# EAGLE board hora_panel (EAGLE 9.6.2)
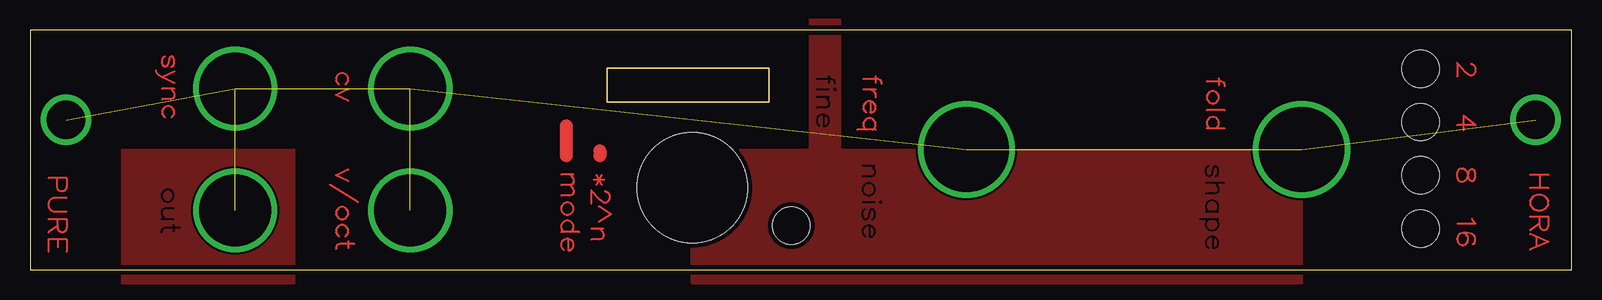
[diagram p0: board, top side]
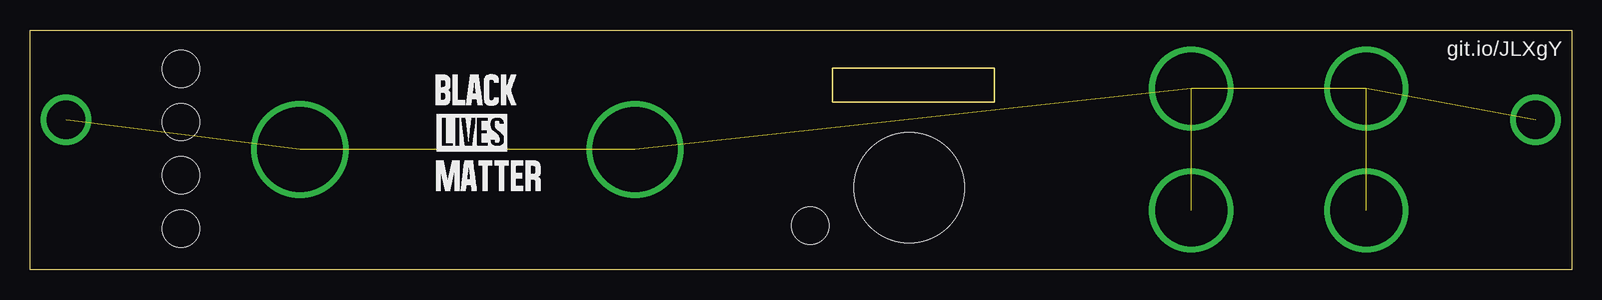
[diagram p1: board, bottom side, seen from below]

Size 128.5 x 20 mm. Coordinates in mm from the lower left corner, seen from the top.
Outline: 0,20 0,0 128.5,0 128.5,20 0,20
Outline: 48.1,16.8 61.6,16.8 61.6,14 48.1,14 48.1,16.8
Copper layers (1*16): Top 0.0356mm / dielectric 1.5011mm / Bottom 0.0356mm
Design rules "oshpark-2layer": minimum track width 6mil, minimum drill 13mil, track to track 6mil, track to pad 6mil, pad to pad 6mil, via to via 6mil, smd to smd 6mil, copper to edge 15mil, drill to drill 6mil, minimum pad ring 7mil, minimum via ring 7mil, stop-mask expansion 2.5mil, vias tented up to drill 0mil, thermal gap 10mil
Net classes: 0 default: width 0.203 mm; 1 power: width 0.305 mm; 2 ground: width 0.305 mm
Holes 3.1 mm at 63.45,3.67 115.91,16.76 115.91,12.31 115.91,7.87 115.91,3.42
Holes 9.2 mm at 55.2,6.85
tRestrict: 195 lines
Milling: area 48.1,14 to 61.6,16.8

## Placement (x,y rotation side)
U$1  [BLACK-SILK-XS]  94.7,13.72 0 bottom
U$2  [LIVES-SILK-XS]  94.6,9.9 0 bottom
U$3  [MATTER-SILK-XS]  94.66,6.6 0 bottom

## Library data of the parts
U$1-U$3 = BLACK_LIVES_MATTER

## Tracks (layer width: path | path; a pad name or v marks a point on that pad's centre or on a via)
GND  (via drill 3.2, 6, 7.1)  (7 unrouted)
  other vias: 17.1,15.11 31.7,15.11 17.1,4.95 31.7,4.95 78.06,10.03 3,12.5 106,10.03 125.5,12.5
N$1
  Top 1.1: 44.7,12 44.7,9.5
N$2
  Top 1.1: 47.5,9.9 47.5,9.5
N$3
  Top 0.168: 44.36,4.81 44.5,4.65
N$4
  Top 0.168: 47.86,7.49 47,7.49
N$5
  Top 0.168: 47.65,7.89 47.22,7.09
N$6
  Top 0.168: 47.65,7.09 47.22,7.89
N$7
  Top 0.168: 47.93,6.54 48.01,6.54
N$8
  Top 0.168: 48.01,6.54 48.15,6.46
N$9
  Top 0.168: 48.15,6.46 48.22,6.38
N$10
  Top 0.168: 48.22,6.38 48.29,6.22
N$11
  Top 0.168: 48.29,6.22 48.29,5.9
N$12
  Top 0.168: 48.29,5.9 48.22,5.74
N$13
  Top 0.168: 48.22,5.74 48.15,5.66
N$14
  Top 0.168: 48.15,5.66 48.01,5.58
N$15
  Top 0.168: 48.01,5.58 47.86,5.58
N$16
  Top 0.168: 47.86,5.58 47.72,5.66
N$17
  Top 0.168: 47.72,5.66 47.5,5.82
N$18
  Top 0.168: 47.5,5.82 46.78,6.62
N$19
  Top 0.168: 46.78,6.62 46.78,5.5
N$20
  Top 0.168: 48.44,4.62 47.43,5.26
N$21
  Top 0.168: 48.44,4.62 47.43,3.98
N$22
  Top 0.168: 47.8,3.4 47.51,3.4
N$23
  Top 0.168: 47.51,3.4 46.79,3.4
N$24
  Top 0.168: 47.51,3.4 47.73,3.16
N$25
  Top 0.168: 47.73,3.16 47.8,3
N$26
  Top 0.168: 47.8,3 47.8,2.76
N$27
  Top 0.168: 47.8,2.76 47.73,2.6
N$28
  Top 0.168: 47.73,2.6 47.51,2.52
N$29
  Top 0.168: 47.51,2.52 46.79,2.52
N$30
  Top 0.168: 45.3,7.93 45.01,7.93
N$31
  Top 0.168: 45.01,7.93 44.29,7.93
N$32
  Top 0.168: 45.01,7.93 45.22,7.69
N$33
  Top 0.168: 45.22,7.69 45.3,7.53
N$34
  Top 0.168: 45.3,7.53 45.3,7.29
N$35
  Top 0.168: 45.3,7.29 45.22,7.13
N$36
  Top 0.168: 45.22,7.13 45.01,7.05
N$37
  Top 0.168: 45.01,7.05 44.29,7.05
N$38
  Top 0.168: 45.01,7.05 45.22,6.81
N$39
  Top 0.168: 45.22,6.81 45.3,6.65
N$40
  Top 0.168: 45.3,6.65 45.3,6.41
N$41
  Top 0.168: 45.3,6.41 45.22,6.25
N$42
  Top 0.168: 45.22,6.25 45.01,6.17
N$43
  Top 0.168: 45.01,6.17 44.29,6.17
N$44
  Top 0.168: 45.3,5.21 45.22,5.37
N$45
  Top 0.168: 45.22,5.37 45.08,5.53
N$46
  Top 0.168: 45.08,5.53 44.86,5.61
N$47
  Top 0.168: 44.86,5.61 44.72,5.61
N$48
  Top 0.168: 44.72,5.61 44.5,5.53
N$49
  Top 0.168: 44.5,5.53 44.36,5.37
N$50
  Top 0.168: 2.25,7.64 3.04,7.64 3.04,6.92 2.97,6.68 2.9,6.6 2.76,6.52 2.54,6.52 2.4,6.6 2.33,6.68 2.25,6.92 2.25,7.64 | 2.25,7.64 1.54,7.64
N$51
  Top 0.168: 3.04,5.96 1.97,5.96 1.75,5.88 1.61,5.72 1.54,5.48 1.54,5.32 1.61,5.08 1.75,4.92 1.97,4.84 3.04,4.84
N$52
  Top 0.168: 2.33,4.21 3.04,4.21 3.04,3.49 2.97,3.25 2.9,3.17 2.76,3.09 2.61,3.09 2.47,3.17 2.4,3.25 2.33,3.49 2.33,3.65 | 2.33,4.21 1.54,4.21 | 2.33,3.65 2.33,4.21 | 2.33,3.65 1.54,3.09
N$53
  Top 0.168: 2.33,2.53 3.04,2.53 3.04,1.49 | 2.33,2.53 1.54,2.53 1.54,1.49 | 2.33,2.53 2.33,1.89
N$54
  Top 0.168: 126.56,7.91 125.85,7.91 | 125.85,7.91 125.06,7.91 | 126.56,6.79 125.85,6.79 | 125.85,6.79 125.06,6.79 | 125.85,7.91 125.85,6.79
N$55
  Top 0.168: 44.36,5.37 44.29,5.21
N$56
  Top 0.168: 126.56,5.75 126.49,5.91 126.35,6.07 126.2,6.15 125.99,6.23 125.63,6.23 125.42,6.15 125.27,6.07 125.13,5.91 125.06,5.75 125.06,5.43 125.13,5.28 125.27,5.12 125.42,5.04 125.63,4.96 125.99,4.96 126.2,5.04 126.35,5.12 126.49,5.28 126.56,5.43 126.56,5.75
N$57
  Top 0.168: 125.85,4.4 126.56,4.4 126.56,3.68 126.49,3.44 126.42,3.36 126.28,3.28 126.13,3.28 125.99,3.36 125.92,3.44 125.85,3.68 125.85,3.84 | 125.85,4.4 125.06,4.4 | 125.85,3.84 125.85,4.4 | 125.85,3.84 125.06,3.28
N$58
  Top 0.168: 125.06,2.96 126.56,2.32 125.06,1.68
N$59
  Top 0.168: 125.56,2.72 125.56,1.92
N$60
  Top 0.168: 44.29,5.21 44.29,4.97
N$61
  Top 0.168: 44.29,4.97 44.36,4.81
N$62
  Top 0.168: 44.5,4.65 44.72,4.57
N$63
  Top 0.168: 44.72,4.57 44.86,4.57
N$64
  Top 0.168: 44.86,4.57 45.08,4.65
N$65
  Top 0.168: 45.08,4.65 45.22,4.81
N$66
  Top 0.168: 45.22,4.81 45.3,4.97
N$67
  Top 0.168: 45.3,4.97 45.3,5.21
N$68
  Top 0.168: 45.8,3.14 45.08,3.14
N$69
  Top 0.168: 45.08,3.14 44.5,3.14
N$70
  Top 0.168: 44.5,3.14 44.29,3.14
N$71
  Top 0.168: 45.08,3.14 45.22,3.3
N$72
  Top 0.168: 45.22,3.3 45.3,3.46
N$73
  Top 0.168: 45.3,3.46 45.3,3.69
N$74
  Top 0.168: 45.3,3.69 45.22,3.85
N$75
  Top 0.168: 45.22,3.85 45.08,4.01
N$76
  Top 0.168: 45.08,4.01 44.86,4.09
N$77
  Top 0.168: 44.86,4.09 44.72,4.09
N$78
  Top 0.168: 44.72,4.09 44.5,4.01
N$79
  Top 0.168: 44.5,4.01 44.36,3.85
N$80
  Top 0.168: 44.36,3.85 44.29,3.69
N$81
  Top 0.168: 44.29,3.69 44.29,3.46
N$82
  Top 0.168: 44.29,3.46 44.36,3.3
N$83
  Top 0.168: 44.36,3.3 44.5,3.14
N$84
  Top 0.168: 44.86,2.58 44.86,1.62
N$85
  Top 0.168: 44.86,1.62 45.01,1.62
N$86
  Top 0.168: 45.01,1.62 45.15,1.7
N$87
  Top 0.168: 45.15,1.7 45.22,1.78
N$88
  Top 0.168: 45.22,1.78 45.3,1.94
N$89
  Top 0.168: 45.3,1.94 45.3,2.18
N$90
  Top 0.168: 45.3,2.18 45.22,2.34
N$91
  Top 0.168: 45.22,2.34 45.08,2.5
N$92
  Top 0.168: 45.08,2.5 44.86,2.58
N$93
  Top 0.168: 44.86,2.58 44.72,2.58
N$94
  Top 0.168: 44.72,2.58 44.5,2.5
N$95
  Top 0.168: 44.5,2.5 44.36,2.34
N$96
  Top 0.168: 44.36,2.34 44.29,2.18
N$97
  Top 0.168: 44.29,2.18 44.29,1.94
N$98
  Top 0.168: 44.29,1.94 44.36,1.78
N$99
  Top 0.168: 44.36,1.78 44.5,1.62
N$100
  Top 0.168: 99.6,15.3 99.6,15.46
N$101
  Top 0.168: 99.6,15.46 99.53,15.62
N$102
  Top 0.168: 99.53,15.62 99.32,15.7
N$103
  Top 0.168: 99.32,15.7 98.09,15.7
N$104
  Top 0.168: 99.1,15.94 99.1,15.38
N$105
  Top 0.168: 99.1,14.51 99.03,14.67
N$106
  Top 0.168: 99.03,14.67 98.89,14.83
N$107
  Top 0.168: 98.89,14.83 98.67,14.91
N$108
  Top 0.168: 98.67,14.91 98.53,14.91
N$109
  Top 0.168: 98.53,14.91 98.31,14.83
N$110
  Top 0.168: 98.31,14.83 98.17,14.67
N$111
  Top 0.168: 98.17,14.67 98.09,14.51
N$112
  Top 0.168: 98.09,14.51 98.09,14.27
N$113
  Top 0.168: 98.09,14.27 98.17,14.11
N$114
  Top 0.168: 98.17,14.11 98.31,13.95
N$115
  Top 0.168: 98.31,13.95 98.53,13.87
N$116
  Top 0.168: 98.53,13.87 98.67,13.87
N$117
  Top 0.168: 98.67,13.87 98.89,13.95
N$118
  Top 0.168: 98.89,13.95 99.03,14.11
N$119
  Top 0.168: 99.03,14.11 99.1,14.27
N$120
  Top 0.168: 99.1,14.27 99.1,14.51
N$121
  Top 0.168: 99.6,13.31 98.09,13.31
N$122
  Top 0.168: 99.6,11.79 98.89,11.79
N$123
  Top 0.168: 98.89,11.79 98.31,11.79
N$124
  Top 0.168: 98.31,11.79 98.09,11.79
N$125
  Top 0.168: 98.89,11.79 99.03,11.95
N$126
  Top 0.168: 99.03,11.95 99.1,12.11
N$127
  Top 0.168: 99.1,12.11 99.1,12.35
N$128
  Top 0.168: 99.1,12.35 99.03,12.51
N$129
  Top 0.168: 99.03,12.51 98.89,12.67
N$130
  Top 0.168: 98.89,12.67 98.67,12.75
N$131
  Top 0.168: 98.67,12.75 98.53,12.75
N$132
  Top 0.168: 98.53,12.75 98.31,12.67
N$133
  Top 0.168: 98.31,12.67 98.17,12.51
N$134
  Top 0.168: 98.17,12.51 98.09,12.35
N$135
  Top 0.168: 98.09,12.35 98.09,12.11
N$136
  Top 0.168: 98.09,12.11 98.17,11.95
N$137
  Top 0.168: 98.17,11.95 98.31,11.79
N$138
  pour Top: 65,8.8 65,20.9 67.5,20.9 67.5,8.8
N$139
  pour Top: 55.2,10.03 106,10.03 106,-1.2 55.2,-1.2
N$140
  pour Top: 7.7,10.03 22,10.03 22,-1.2 7.7,-1.2
N$210
  Top 0.168: 120.13,17.16 120.2,17.16
N$211
  Top 0.168: 120.2,17.16 120.34,17.08
N$212
  Top 0.168: 120.34,17.08 120.42,17
N$213
  Top 0.168: 120.42,17 120.49,16.84
N$214
  Top 0.168: 120.49,16.84 120.49,16.52
N$215
  Top 0.168: 120.49,16.52 120.42,16.36
N$216
  Top 0.168: 120.42,16.36 120.34,16.29
N$217
  Top 0.168: 120.34,16.29 120.2,16.2
N$218
  Top 0.168: 120.2,16.2 120.06,16.2
N$219
  Top 0.168: 120.06,16.2 119.91,16.29
N$220
  Top 0.168: 119.91,16.29 119.7,16.44
N$221
  Top 0.168: 119.7,16.44 118.98,17.24
N$222
  Top 0.168: 118.98,17.24 118.98,16.12
N$223
  Top 0.168: 120.49,12.04 119.48,12.84
N$224
  Top 0.168: 119.48,12.84 119.48,11.64
N$225
  Top 0.168: 120.49,12.04 118.98,12.04
N$226
  Top 0.168: 120.49,8.04 120.42,8.28
N$227
  Top 0.168: 120.42,8.28 120.27,8.36
N$228
  Top 0.168: 120.27,8.36 120.13,8.36
N$229
  Top 0.168: 120.13,8.36 119.98,8.28
N$230
  Top 0.168: 119.98,8.28 119.91,8.12
N$231
  Top 0.168: 119.91,8.12 119.84,7.8
N$232
  Top 0.168: 119.84,7.8 119.77,7.56
N$233
  Top 0.168: 119.77,7.56 119.62,7.41
N$234
  Top 0.168: 119.62,7.41 119.48,7.33
N$235
  Top 0.168: 119.48,7.33 119.27,7.33
N$236
  Top 0.168: 119.27,7.33 119.12,7.41
N$237
  Top 0.168: 119.12,7.41 119.05,7.49
N$238
  Top 0.168: 119.05,7.49 118.98,7.72
N$239
  Top 0.168: 118.98,7.72 118.98,8.04
N$240
  Top 0.168: 118.98,8.04 119.05,8.28
N$241
  Top 0.168: 119.05,8.28 119.12,8.36
N$242
  Top 0.168: 119.12,8.36 119.27,8.44
N$243
  Top 0.168: 119.27,8.44 119.48,8.44
N$244
  Top 0.168: 119.48,8.44 119.62,8.36
N$245
  Top 0.168: 119.62,8.36 119.77,8.2
N$246
  Top 0.168: 119.77,8.2 119.84,7.96
N$247
  Top 0.168: 119.84,7.96 119.91,7.64
N$248
  Top 0.168: 119.91,7.64 119.98,7.49
N$249
  Top 0.168: 119.98,7.49 120.13,7.41
N$250
  Top 0.168: 120.13,7.41 120.27,7.41
N$251
  Top 0.168: 120.27,7.41 120.42,7.49
N$252
  Top 0.168: 120.42,7.49 120.49,7.72
N$253
  Top 0.168: 120.49,7.72 120.49,8.04
N$254
  Top 0.168: 120.2,4.23 120.27,4.07
N$255
  Top 0.168: 120.27,4.07 120.49,3.83
N$256
  Top 0.168: 120.49,3.83 118.98,3.83
N$257
  Top 0.168: 120.25,2.1 120.4,2.18
N$258
  Top 0.168: 120.4,2.18 120.47,2.42
N$259
  Top 0.168: 120.47,2.42 120.47,2.58
N$260
  Top 0.168: 120.47,2.58 120.4,2.82
N$261
  Top 0.168: 120.4,2.82 120.18,2.98
N$262
  Top 0.168: 120.18,2.98 119.82,3.06
N$263
  Top 0.168: 119.82,3.06 119.47,3.06
N$264
  Top 0.168: 119.47,3.06 119.18,2.98
N$265
  Top 0.168: 119.18,2.98 119.03,2.82
N$266
  Top 0.168: 119.03,2.82 118.96,2.58
N$267
  Top 0.168: 118.96,2.58 118.96,2.5
N$268
  Top 0.168: 118.96,2.5 119.03,2.26
N$269
  Top 0.168: 119.03,2.26 119.18,2.1
N$270
  Top 0.168: 119.18,2.1 119.39,2.02
N$271
  Top 0.168: 119.39,2.02 119.47,2.02
N$272
  Top 0.168: 119.47,2.02 119.68,2.1
N$273
  Top 0.168: 119.68,2.1 119.82,2.26
N$274
  Top 0.168: 119.82,2.26 119.9,2.5
N$275
  Top 0.168: 119.9,2.5 119.9,2.58
N$276
  Top 0.168: 119.9,2.58 119.82,2.82
N$277
  Top 0.168: 119.82,2.82 119.68,2.98
N$278
  Top 0.168: 119.68,2.98 119.47,3.06
N$313
  Top 0.168: 70.99,15.5 70.99,15.66
N$314
  Top 0.168: 70.99,15.66 70.92,15.82
N$315
  Top 0.168: 70.92,15.82 70.7,15.9
N$316
  Top 0.168: 70.7,15.9 69.48,15.9
N$317
  Top 0.168: 70.48,16.14 70.48,15.58
N$318
  Top 0.168: 70.48,15.03 70.05,15.03
N$319
  Top 0.168: 70.05,15.03 69.48,15.03
N$320
  Top 0.168: 70.05,15.03 70.27,14.95
N$321
  Top 0.168: 70.27,14.95 70.41,14.79
N$322
  Top 0.168: 70.41,14.79 70.48,14.63
N$323
  Top 0.168: 70.48,14.63 70.48,14.39
N$324
  Top 0.168: 70.05,14.07 70.05,13.11
N$325
  Top 0.168: 70.05,13.11 70.2,13.11
N$326
  Top 0.168: 70.2,13.11 70.34,13.19
N$327
  Top 0.168: 70.34,13.19 70.41,13.27
N$328
  Top 0.168: 70.41,13.27 70.48,13.43
N$329
  Top 0.168: 70.48,13.43 70.48,13.67
N$330
  Top 0.168: 70.48,13.67 70.41,13.83
N$331
  Top 0.168: 70.41,13.83 70.27,13.99
N$332
  Top 0.168: 70.27,13.99 70.05,14.07
N$333
  Top 0.168: 70.05,14.07 69.91,14.07
N$334
  Top 0.168: 69.91,14.07 69.69,13.99
N$335
  Top 0.168: 69.69,13.99 69.55,13.83
N$336
  Top 0.168: 69.55,13.83 69.48,13.67
N$337
  Top 0.168: 69.48,13.67 69.48,13.43
N$338
  Top 0.168: 69.48,13.43 69.55,13.27
N$339
  Top 0.168: 69.55,13.27 69.69,13.11
N$340
  Top 0.168: 70.48,11.67 70.27,11.67
N$341
  Top 0.168: 70.27,11.67 69.69,11.67
N$342
  Top 0.168: 69.69,11.67 68.97,11.67
N$343
  Top 0.168: 70.27,11.67 70.41,11.83
N$344
  Top 0.168: 70.41,11.83 70.48,11.99
N$345
  Top 0.168: 70.48,11.99 70.48,12.23
N$346
  Top 0.168: 70.48,12.23 70.41,12.39
N$347
  Top 0.168: 70.41,12.39 70.27,12.55
N$348
  Top 0.168: 70.27,12.55 70.05,12.63
N$349
  Top 0.168: 70.05,12.63 69.91,12.63
N$350
  Top 0.168: 69.91,12.63 69.69,12.55
N$351
  Top 0.168: 69.69,12.55 69.55,12.39
N$352
  Top 0.168: 69.55,12.39 69.48,12.23
N$353
  Top 0.168: 69.48,12.23 69.48,11.99
N$354
  Top 0.168: 69.48,11.99 69.55,11.83
N$355
  Top 0.168: 69.55,11.83 69.69,11.67
N$417
  Top 0.168: 26.31,15.45 26.45,15.61
N$418
  Top 0.168: 26.45,15.61 26.53,15.77
N$419
  Top 0.168: 26.53,15.77 26.53,16.01
N$420
  Top 0.168: 26.53,16.01 26.45,16.17
N$421
  Top 0.168: 26.45,16.17 26.31,16.33
N$422
  Top 0.168: 26.31,16.33 26.09,16.41
N$423
  Top 0.168: 26.09,16.41 25.95,16.41
N$424
  Top 0.168: 25.95,16.41 25.73,16.33
N$425
  Top 0.168: 25.73,16.33 25.59,16.17
N$426
  Top 0.168: 25.59,16.17 25.52,16.01
N$427
  Top 0.168: 25.52,16.01 25.52,15.77
N$428
  Top 0.168: 25.52,15.77 25.59,15.61
N$429
  Top 0.168: 25.59,15.61 25.73,15.45
N$430
  Top 0.168: 26.53,15.05 25.52,14.57
N$431
  Top 0.168: 26.53,14.09 25.52,14.57
N$432
  Top 0.168: 26.53,8.35 25.52,7.87
N$433
  Top 0.168: 26.53,7.39 25.52,7.87
N$434
  Top 0.168: 27.32,5.64 25.02,7.08
N$435
  Top 0.168: 26.53,4.84 26.45,5
N$436
  Top 0.168: 26.45,5 26.31,5.16
N$437
  Top 0.168: 26.31,5.16 26.09,5.24
N$438
  Top 0.168: 26.09,5.24 25.95,5.24
N$439
  Top 0.168: 25.95,5.24 25.73,5.16
N$440
  Top 0.168: 25.73,5.16 25.59,5
N$441
  Top 0.168: 25.59,5 25.52,4.84
N$442
  Top 0.168: 25.52,4.84 25.52,4.6
N$443
  Top 0.168: 25.52,4.6 25.59,4.44
N$444
  Top 0.168: 25.59,4.44 25.73,4.28
N$445
  Top 0.168: 25.73,4.28 25.95,4.2
N$446
  Top 0.168: 25.95,4.2 26.09,4.2
N$447
  Top 0.168: 26.09,4.2 26.31,4.28
N$448
  Top 0.168: 26.31,4.28 26.45,4.44
N$449
  Top 0.168: 26.45,4.44 26.53,4.6
N$450
  Top 0.168: 26.53,4.6 26.53,4.84
N$451
  Top 0.168: 26.31,2.76 26.45,2.92
N$452
  Top 0.168: 26.45,2.92 26.53,3.08
N$453
  Top 0.168: 26.53,3.08 26.53,3.32
N$454
  Top 0.168: 26.53,3.32 26.45,3.48
N$455
  Top 0.168: 26.45,3.48 26.31,3.64
N$456
  Top 0.168: 26.31,3.64 26.09,3.72
N$457
  Top 0.168: 26.09,3.72 25.95,3.72
N$458
  Top 0.168: 25.95,3.72 25.73,3.64
N$459
  Top 0.168: 25.73,3.64 25.59,3.48
N$460
  Top 0.168: 25.59,3.48 25.52,3.32
N$461
  Top 0.168: 25.52,3.32 25.52,3.08
N$462
  Top 0.168: 25.52,3.08 25.59,2.92
N$463
  Top 0.168: 25.59,2.92 25.73,2.76
N$464
  Top 0.168: 27.03,2.13 25.81,2.13
N$465
  Top 0.168: 25.81,2.13 25.59,2.05
N$466
  Top 0.168: 25.59,2.05 25.52,1.89
N$467
  Top 0.168: 25.52,1.89 25.52,1.73
N$468
  Top 0.168: 26.53,2.37 26.53,1.81
N$469
  Top 0.168: 11.81,16.93 11.95,17.01
N$470
  Top 0.168: 11.95,17.01 12.03,17.25
N$471
  Top 0.168: 12.03,17.25 12.03,17.49
N$472
  Top 0.168: 12.03,17.49 11.95,17.73
N$473
  Top 0.168: 11.95,17.73 11.81,17.81
N$474
  Top 0.168: 11.81,17.81 11.67,17.73
N$475
  Top 0.168: 11.67,17.73 11.6,17.57
N$476
  Top 0.168: 11.6,17.57 11.52,17.17
N$477
  Top 0.168: 11.52,17.17 11.45,17.01
N$478
  Top 0.168: 11.45,17.01 11.31,16.93
N$479
  Top 0.168: 11.31,16.93 11.23,16.93
N$480
  Top 0.168: 11.23,16.93 11.09,17.01
N$481
  Top 0.168: 11.09,17.01 11.02,17.25
N$482
  Top 0.168: 11.02,17.25 11.02,17.49
N$483
  Top 0.168: 11.02,17.49 11.09,17.73
N$484
  Top 0.168: 11.09,17.73 11.23,17.81
N$485
  Top 0.168: 12.03,16.53 11.02,16.05
N$486
  Top 0.168: 12.03,15.57 11.02,16.05
N$487
  Top 0.168: 11.02,16.05 10.73,16.21
N$488
  Top 0.168: 10.73,16.21 10.59,16.37
N$489
  Top 0.168: 10.59,16.37 10.52,16.53
N$490
  Top 0.168: 10.52,16.53 10.52,16.61
N$491
  Top 0.168: 12.03,15.09 11.74,15.09
N$492
  Top 0.168: 11.74,15.09 11.02,15.09
N$493
  Top 0.168: 11.74,15.09 11.95,14.85
N$494
  Top 0.168: 11.95,14.85 12.03,14.69
N$495
  Top 0.168: 12.03,14.69 12.03,14.45
N$496
  Top 0.168: 12.03,14.45 11.95,14.29
N$497
  Top 0.168: 11.95,14.29 11.74,14.21
N$498
  Top 0.168: 11.74,14.21 11.02,14.21
N$499
  Top 0.168: 11.81,12.7 11.95,12.86
N$500
  Top 0.168: 11.95,12.86 12.03,13.02
N$501
  Top 0.168: 12.03,13.02 12.03,13.26
N$502
  Top 0.168: 12.03,13.26 11.95,13.41
N$503
  Top 0.168: 11.95,13.41 11.81,13.57
N$504
  Top 0.168: 11.81,13.57 11.6,13.65
N$505
  Top 0.168: 11.6,13.65 11.45,13.65
N$506
  Top 0.168: 11.45,13.65 11.23,13.57
N$507
  Top 0.168: 11.23,13.57 11.09,13.41
N$508
  Top 0.168: 11.09,13.41 11.02,13.26
N$509
  Top 0.168: 11.02,13.26 11.02,13.02
N$510
  Top 0.168: 11.02,13.02 11.09,12.86
N$511
  Top 0.168: 11.09,12.86 11.23,12.7

## Text on the board
bPlace: git.io/JLXgY